# EAGLE board synth-a-phone-v1.1 (EAGLE 5.11)
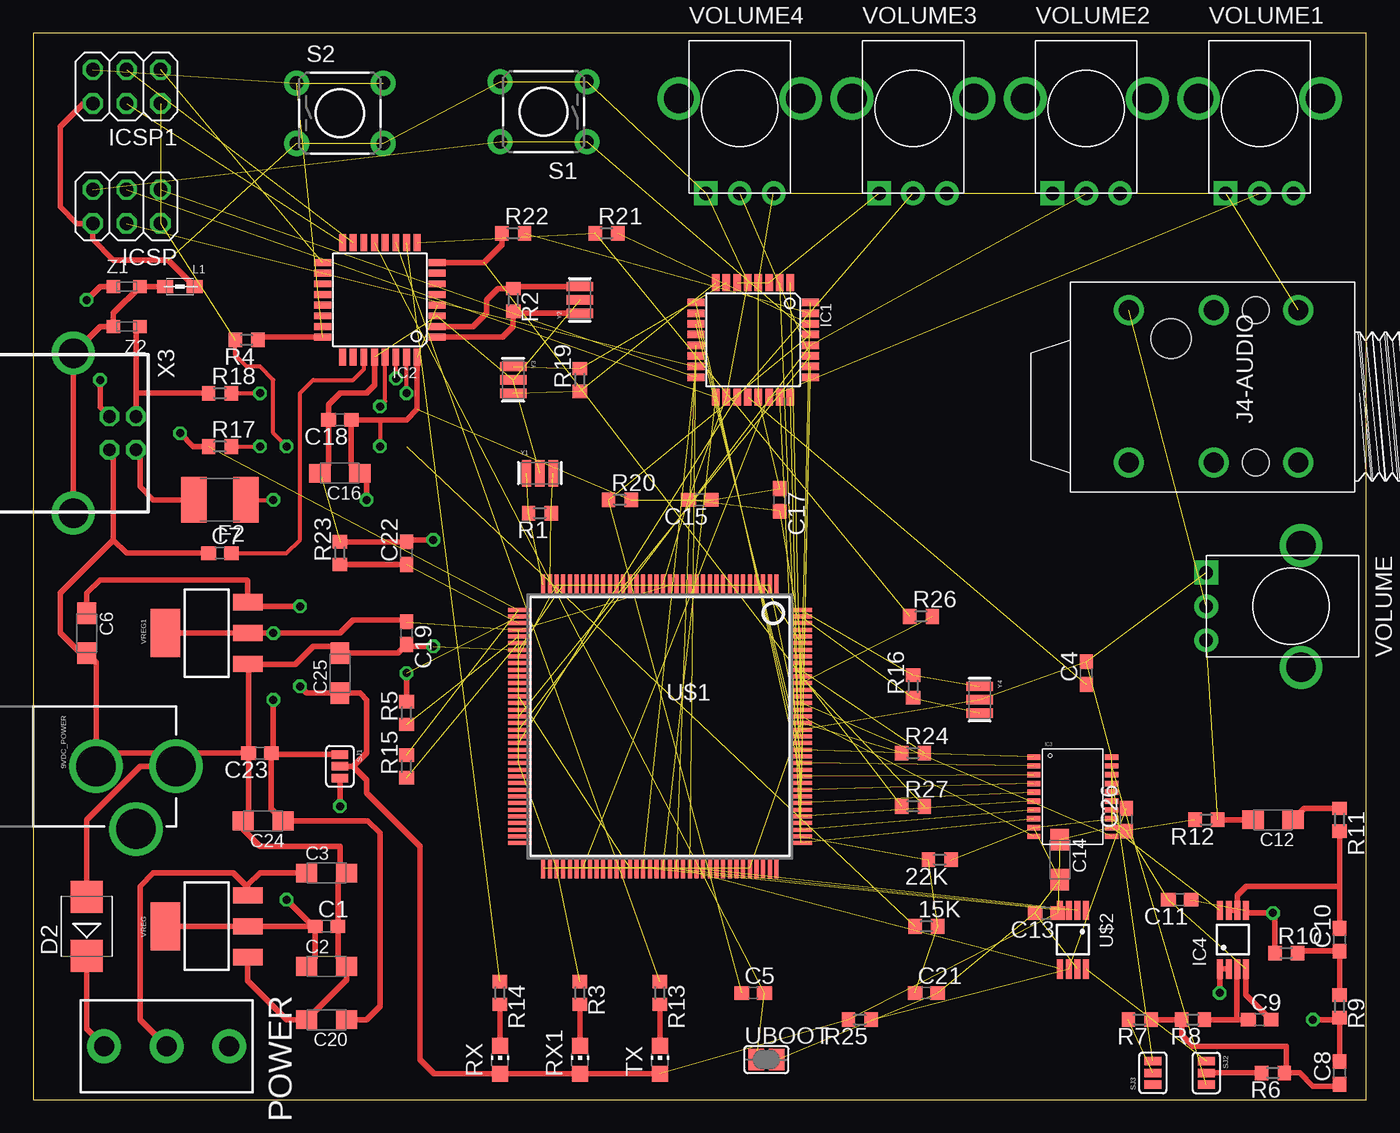
[diagram p0: board, top side]
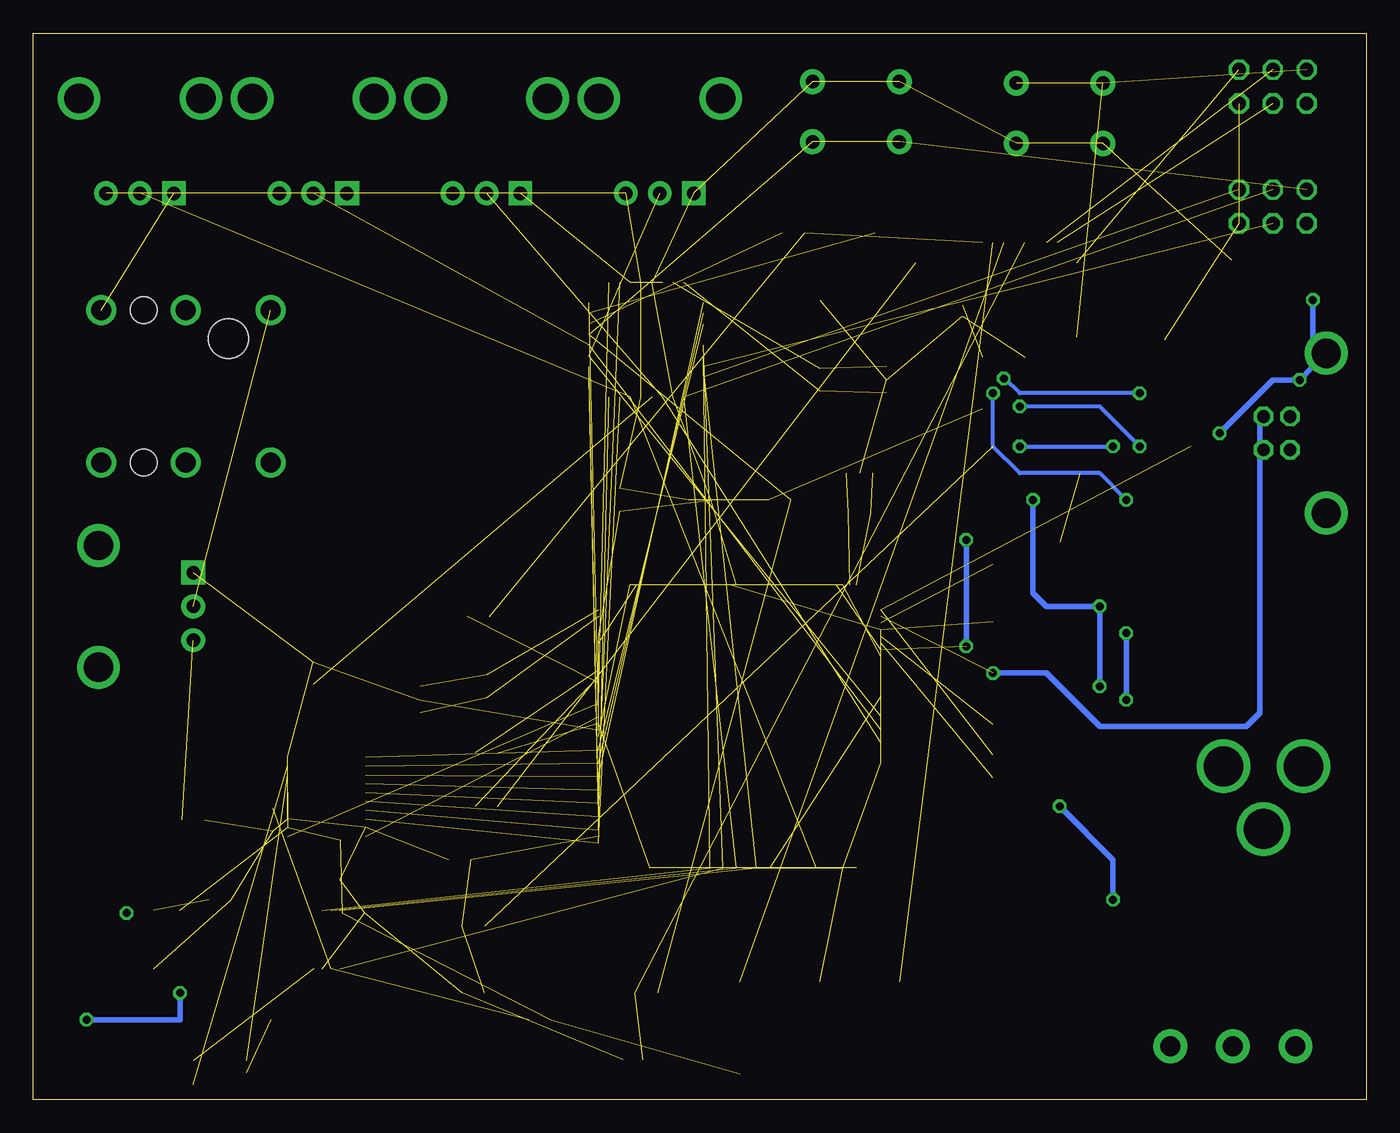
[diagram p1: board, bottom side, seen from below]

Size 100 x 80 mm. Coordinates in mm from the lower left corner, seen from the top.
Outline: 0,0 100,0 100,80 0,80 0,0
Copper layers (1*16): Top 0.035mm / dielectric 1.5mm / Bottom 0.035mm
Design rules "default": minimum track width 10mil, minimum drill 0.6mm, track to track 8mil, track to pad 8mil, pad to pad 8mil, via to via 8mil, smd to smd 8mil, copper to edge 40mil, drill to drill 8mil, minimum pad ring 10mil, minimum via ring 8mil, stop-mask expansion 4mil, vias tented up to drill 0mil, thermal gap 10mil

## Footprints (pad centres in the part's own frame; a part is rotated, then mirrored left to right if it is on the bottom)
POWER_JACK_PTH = drill 2.997 round: GND 0,7.7; GNDBREAK 4.7,10.7; PWR 0,13.7
R0603 = smd 1 x 1.1: 1 -0.85,0; 2 0.85,0
C0603 = smd 1.1 x 1: 1 -0.85,0; 2 0.85,0
SMC_A = smd 1.6 x 1.4: + -1.5,0; - 1.5,0
SMB = smd 2.4 x 2.4: A 2.2,0; C -2.2,0
L1812 = smd 1.9 x 3.4: 1 -1.95,0; 2 1.95,0
AVR_TQFP32-08 = smd 1.27 x 0.559: 1 -4.293,2.8; 2 -4.293,2; 3 -4.293,1.2; 4 -4.293,0.4; 5 -4.293,-0.4; 6 -4.293,-1.2; 7 -4.293,-2; 8 -4.293,-2.8; 17 4.293,-2.8; 18 4.293,-2; 19 4.293,-1.2; 20 4.293,-0.4; 21 4.293,0.4; 22 4.293,1.2; 23 4.293,2; 24 4.293,2.8 | smd 0.559 x 1.27: 9 -2.8,-4.293; 10 -2,-4.293; 11 -1.2,-4.293; 12 -0.4,-4.293; 13 0.4,-4.293; 14 1.2,-4.293; 15 2,-4.293; 16 2.8,-4.293; 25 2.8,4.293; 26 2,4.293; 27 1.2,4.293; 28 0.4,4.293; 29 -0.4,4.293; 30 -1.2,4.293; 31 -2,4.293; 32 -2.8,4.293
TQFP32-08 = smd 1.27 x 0.508: 1 -4.293,2.8; 2 -4.293,2; 3 -4.293,1.2; 4 -4.293,0.4; 5 -4.293,-0.4; 6 -4.293,-1.2; 7 -4.293,-2; 8 -4.293,-2.8; 17 4.293,-2.8; 18 4.293,-2; 19 4.293,-1.2; 20 4.293,-0.4; 21 4.293,0.4; 22 4.293,1.2; 23 4.293,2; 24 4.293,2.8 | smd 0.508 x 1.27: 9 -2.8,-4.293; 10 -2,-4.293; 11 -1.2,-4.293; 12 -0.4,-4.293; 13 0.4,-4.293; 14 1.2,-4.293; 15 2,-4.293; 16 2.8,-4.293; 25 2.8,4.293; 26 2,4.293; 27 1.2,4.293; 28 0.4,4.293; 29 -0.4,4.293; 30 -1.2,4.293; 31 -2,4.293; 32 -2.8,4.293
TSSOP20 = smd 1 x 0.4: 1 -2.937,2.693; 2 -2.937,2.032; 3 -2.937,1.372; 4 -2.937,0.712; 5 -2.937,0.051; 6 -2.937,-0.609; 7 -2.937,-1.27; 8 -2.943,-1.93; 9 -2.937,-2.59; 10 -2.937,-3.251; 11 2.905,-3.251; 12 2.905,-2.59; 13 2.911,-1.93; 14 2.905,-1.27; 15 2.905,-0.609; 16 2.905,0.051; 17 2.905,0.712; 18 2.905,1.372; 19 2.905,2.032; 20 2.905,2.693
MSOP8 = smd 1.45 x 0.45: 1 -2.2,0.975; 2 -2.2,0.325; 3 -2.2,-0.325; 4 -2.2,-0.975; 5 2.2,-0.975; 6 2.2,-0.325; 7 2.2,0.325; 8 2.2,0.975
2X03 = drill 1.016 octagon: 1 -2.54,-1.27; 2 -2.54,1.27; 3 0,-1.27; 4 0,1.27; 5 2.54,-1.27; 6 2.54,1.27
NRJ6HF-1 = drill 1.5 round: G -4.2,-5.91; R 7.23,0.44; RN -4.2,0.44; S 7.23,-5.91; T 7.23,6.79; TN -4.2,6.79 | hole 2: 7.23,-2.71; -4.2,-2.71 | hole 3: 5.1,3.64
0805 = smd 1.2 x 1: 1 -1.1,0; 2 1.1,0
SWITCH-SPDT = drill 1.5 pad 2.54 round: 1 0,4.699; 2 0,0; 3 0,-4.699
CHIP-LED0805 = smd 1.2 x 1.2: A 0,-1.05; C 0,1.05
TACTILE-PTH = drill 1.016 pad 1.88 round: 1 -3.251,2.261; 2 3.251,2.261; 3 -3.251,-2.261; 4 3.251,-2.261
SJ_3 = smd 0.635 x 1.27: 1 -0.889,0; 2 0,0; 3 0.889,0
SQFP-S-20X20-144 = smd 0.3 x 1.6: 1 -8.75,-10.6; 2 -8.25,-10.6; 3 -7.75,-10.6; 4 -7.25,-10.6; 5 -6.75,-10.6; 6 -6.25,-10.6; 7 -5.75,-10.6; 8 -5.25,-10.6; 9 -4.75,-10.6; 10 -4.25,-10.6; 11 -3.75,-10.6; 12 -3.25,-10.6; 13 -2.75,-10.6; 14 -2.25,-10.6; 15 -1.75,-10.6; 16 -1.25,-10.6; 17 -0.75,-10.6; 18 -0.25,-10.6; 19 0.25,-10.6; 20 0.75,-10.6; 21 1.25,-10.6; 22 1.75,-10.6; 23 2.25,-10.6; 24 2.75,-10.6; 25 3.25,-10.6; 26 3.75,-10.6; 27 4.25,-10.6; 28 4.75,-10.6; 29 5.25,-10.6; 30 5.75,-10.6; 31 6.25,-10.6; 32 6.75,-10.6; 33 7.25,-10.6; 34 7.75,-10.6; 35 8.25,-10.6; 36 8.75,-10.6; 73 8.75,10.6; 74 8.25,10.6; 75 7.75,10.6; 76 7.25,10.6; 77 6.75,10.6; 78 6.25,10.6; 79 5.75,10.6; 80 5.25,10.6; 81 4.75,10.6; 82 4.25,10.6; 83 3.75,10.6; 84 3.25,10.6; 85 2.75,10.6; 86 2.25,10.6; 87 1.75,10.6; 88 1.25,10.6; 89 0.75,10.6; 90 0.25,10.6; 91 -0.25,10.6; 92 -0.75,10.6; 93 -1.25,10.6; 94 -1.75,10.6; 95 -2.25,10.6; 96 -2.75,10.6; 97 -3.25,10.6; 98 -3.75,10.6; 99 -4.25,10.6; 100 -4.75,10.6; 101 -5.25,10.6; 102 -5.75,10.6; 103 -6.25,10.6; 104 -6.75,10.6; 105 -7.25,10.6; 106 -7.75,10.6; 107 -8.25,10.6; 108 -8.75,10.6 | smd 1.6 x 0.3: 37 10.6,-8.75; 38 10.6,-8.25; 39 10.6,-7.75; 40 10.6,-7.25; 41 10.6,-6.75; 42 10.6,-6.25; 43 10.6,-5.75; 44 10.6,-5.25; 45 10.6,-4.75; 46 10.6,-4.25; 47 10.6,-3.75; 48 10.6,-3.25; 49 10.6,-2.75; 50 10.6,-2.25; 51 10.6,-1.75; 52 10.6,-1.25; 53 10.6,-0.75; 54 10.6,-0.25; 55 10.6,0.25; 56 10.6,0.75; 57 10.6,1.25; 58 10.6,1.75; 59 10.6,2.25; 60 10.6,2.75; 61 10.6,3.25; 62 10.6,3.75; 63 10.6,4.25; 64 10.6,4.75; 65 10.6,5.25; 66 10.6,5.75; 67 10.6,6.25; 68 10.6,6.75; 69 10.6,7.25; 70 10.6,7.75; 71 10.6,8.25; 72 10.6,8.75; 109 -10.6,8.75; 110 -10.6,8.25; 111 -10.6,7.75; 112 -10.6,7.25; 113 -10.6,6.75; 114 -10.6,6.25; 115 -10.6,5.75; 116 -10.6,5.25; 117 -10.6,4.75; 118 -10.6,4.25; 119 -10.6,3.75; 120 -10.6,3.25; 121 -10.6,2.75; 122 -10.6,2.25; 123 -10.6,1.75; 124 -10.6,1.25; 125 -10.6,0.75; 126 -10.6,0.25; 127 -10.6,-0.25; 128 -10.6,-0.75; 129 -10.6,-1.25; 130 -10.6,-1.75; 131 -10.6,-2.25; 132 -10.6,-2.75; 133 -10.6,-3.25; 134 -10.6,-3.75; 135 -10.6,-4.25; 136 -10.6,-4.75; 137 -10.6,-5.25; 138 -10.6,-5.75; 139 -10.6,-6.25; 140 -10.6,-6.75; 141 -10.6,-7.25; 142 -10.6,-7.75; 143 -10.6,-8.25; 144 -10.6,-8.75
SJ = smd 1.168 x 1.6: 1 -0.762,0; 2 0.762,0
VACOLOCO_EVUF = drill 2.2 round: CASE1 -4.572,7.112; CASE2 4.572,7.112 | drill 1.016 pad 1.778 square: CCW -2.54,0 | drill 1.016 pad 1.778 round: CW 2.54,0; WIPER 0,0
SOT223 = smd 1.219 x 2.235: 1 -2.311,-3.099; 2 0,-3.099; 3 2.311,-3.099 | smd 3.6 x 2.2: 4 0,3.099
PN61729 = drill 0.95 octagon: 1 1.25,4.71; 2 -1.25,4.71; 3 -1.25,2.71; 4 1.25,2.71 | drill 2.2 round: P$1 -6,0; P$2 6,0
RESONATOR = smd 0.7 x 2: 1 -1,0; 2 0,0; 3 1,0
CT/CN0603 = smd 1 x 1: 1 -1,0; 2 1,0

## Placement (x,y rotation side)
9VDC_POWER  POWER_JACKPTH  [POWER_JACK_PTH]  -3,25 270 top
15K  15k  [R0603]  67,13 0 top
22K  22k  [R0603]  68,18 180 top
C1  0.1uF  [C0603]  22,13 0 top
C2  10uF  [SMC_A]  22,10 0 top
C3  0.33uF  [SMC_A]  22,17 0 top
C4  0.1uF  [C0603]  79,32 90 top
C5  0.1uF  [C0603]  54,8 0 top
C6  10uF  [SMC_A]  4,35 270 top
C7  0.1uF  [C0603]  14,41 0 top
C8  0.01uF  [C0603]  98,2 90 top
C9  470pF  [C0603]  92,6 0 top
C10  0.001uF  [C0603]  98,12 90 top
C11  470pF  [C0603]  86,15 180 top
C12  4.7uF  [SMC_A]  93,21 180 top
C13  0.1uF  [C0603]  76,14 180 top
C14  10uF  [SMC_A]  77,18 270 top
C15  0.1uF  [C0603]  50,45 180 top
C16  10uF  [SMC_A]  23,47 180 top
C17  0.1uF  [C0603]  56,45 270 top
C18  0.1uF  [C0603]  23,51 180 top
C19  0.1uF  [C0603]  28,35 270 top
C20  10uF  [SMC_A]  22,6 180 top
C21  0.1uF  [C0603]  67,8 0 top
C22  10pF  [C0603]  28,41 90 top
C23  0.1uF  [C0603]  17,26 180 top
C24  10uF  [SMC_A]  17.24,20.91 180 top
C25  0.33uF  [SMC_A]  23,32 90 top
C26  10pF  [C0603]  82,21 90 top
D2  M7  [SMB]  4,13 90 top
F2  500mA  [L1812]  14,45 180 top
IC1  AVR_ATMEGA328V-10A  [AVR_TQFP32-08]  54,57 270 top
IC2  ATMEGA32U2-TQFP  [TQFP32-08]  26,60 180 top
IC3  AD7302SMD  [TSSOP20]  78,23 0 top
IC4  MCP6002MSOP8  [MSOP8]  90,12 90 top
ICSP  ICSP  [2X03]  7,67 180 top
ICSP1  ICSP  [2X03]  7,76 180 top
J4-AUDIO  STEREOSWL  [NRJ6HF-1]  89,52 90 top
L1  BLM21  [0805]  11,61 180 top
POWER  SPST  [SWITCH-SPDT]  10,4 270 top
R1  1M  [R0603]  38,44 180 top
R2  1M  [R0603]  36,60 270 top
R3  1k  [R0603]  41,8 270 top
R4  10k  [R0603]  16,57 180 top
R5  1k  [R0603]  28,29 90 top
R6  1K  [R0603]  93,2 180 top
R7  274K  [R0603]  83,6 180 top
R8  10.7K  [R0603]  87,6 180 top
R9  4.64K  [R0603]  98,7 270 top
R10  23.7K  [R0603]  94,11 0 top
R11  100  [R0603]  98,21 270 top
R12  1M  [R0603]  88,21 180 top
R13  1k  [R0603]  47,8 270 top
R14  1k  [R0603]  35,8 270 top
R15  1k  [R0603]  28,25 90 top
R16  1M  [R0603]  66,31 90 top
R17  22  [R0603]  14,49 0 top
R18  22  [R0603]  14,53 0 top
R19  1M  [R0603]  41,54 90 top
R20  10k  [R0603]  44,45 0 top
R21  1k  [R0603]  43,65 0 top
R22  1k  [R0603]  36,65 0 top
R23  6K8  [R0603]  23,41 90 top
R24  1M  [R0603]  66,26 0 top
R25  1M  [R0603]  62,6 180 top
R26  1k  [R0603]  66.61,36.25 0 top
R27  1k  [R0603]  66,22 0 top
RX  YELLOW  [CHIP-LED0805]  35,3 0 top
RX1  YELLOW  [CHIP-LED0805]  41,3 0 top
S1  [TACTILE-PTH]  38.28,74.12 180 top
S2  [TACTILE-PTH]  23,74 0 top
SJ1  [SJ_3]  23,25 270 top
SJ2  [SJ_3]  88,2 270 top
SJ3  [SJ_3]  84,2 90 top
TX  YELLOW  [CHIP-LED0805]  47,3 0 top
U$1  ATSAM3U4ELQFP-144  [SQFP-S-20X20-144]  47,28 180 top
U$2  MCP4921MSOP8  [MSOP8]  78,12 270 top
UBOOT  [SJ]  55,3 0 top
VOLUME  Volume  [VACOLOCO_EVUF]  88,37 270 top
VOLUME1  Volume  [VACOLOCO_EVUF]  92,68 0 top
VOLUME2  Volume  [VACOLOCO_EVUF]  79,68 0 top
VOLUME3  Volume  [VACOLOCO_EVUF]  66,68 0 top
VOLUME4  Volume  [VACOLOCO_EVUF]  53,68 0 top
VREG  LM78L05  [SOT223]  13,13 90 top
VREG1  LM78L05  [SOT223]  13,35 90 top
X3  [PN61729]  3,50 270 top
Y1  16MHz  [RESONATOR]  38,47 0 top
Y2  16MHz  [RESONATOR]  41,60 90 top
Y3  16MHz  [RESONATOR]  36,54 270 top
Y4  16MHz  [RESONATOR]  71,30 270 top
Z1  PGB1010604  [CT/CN0603]  7,61 0 top
Z2  PGB1010604  [CT/CN0603]  7,58 180 top

## Library data of the parts
9VDC_POWER J4-AUDIO POWER VOLUME VOLUME1-VOLUME4 = meeblip
15K 22K C1-C26 F2 R1-R27 = rcl
D2 = diode
IC1 = avr
IC2 = adafruit
IC3 S1 S2 SJ1-SJ3 VREG VREG1 = SparkFun
IC4 U$1 U$2 = Sparky
ICSP ICSP1 = pinhead
L1 = wuerth-elektronik
RX RX1 TX = led
UBOOT = jumper
X3 Y1-Y4 = SmartPrj
Z1 Z2 = varistor

## Nets
+1V8: U$1.2 U$1.16 U$1.27 U$1.34 U$1.44 U$1.50 U$1.86 U$1.125
+3V3: C19.1 C20.+ C23.1 C24.+ R24.1 SJ1.1 U$1.3 U$1.17 U$1.40 U$1.51 U$1.73 U$1.85 U$1.104 U$1.127 U$1.139 VREG1.2 VREG1.4
+5V: C1.1 C2.+ SJ1.3 VREG.2 VREG.4
ANTI_ALIAS_OUT: C12.- R12.1 VOLUME.CW
AREF: C4.1 IC1.20
D+: R15.2 R17.1 U$1.37 X3.3 Z1.1
D-: R5.2 R18.1 U$1.38 X3.2 Z2.1
DAC1_AB: IC1.1 IC3.11 U$1.130
DAC1_DB0: IC1.23 IC3.8 U$1.109
DAC1_DB1: IC1.24 IC3.7 U$1.111
DAC1_DB2: IC1.25 IC3.6 U$1.113
DAC1_DB3: IC1.26 IC3.5 U$1.115
DAC1_DB4: IC1.2 IC3.4 U$1.117
DAC1_DB5: IC1.9 IC3.3 U$1.119
DAC1_DB6: IC1.10 IC3.2 U$1.121
DAC1_DB7: IC1.11 IC3.1 U$1.123
DAC1_VOUTA: IC3.19 SJ2.3
DAC1_VOUTB: IC3.18 SJ3.3
DAC1_WR: IC1.32 IC3.10 U$1.128
DAC2_CS: IC1.14 U$1.95 U$2.2
DAC2_LDAC: IC1.13 U$1.93 U$2.5
DAC2_VOUT: SJ2.1 U$2.8
DTR: C5.2 IC2.13 UBOOT.1
FWUP: R24.2 U$1.135
GND: 9VDC_POWER.GND 22K.1 C1.2 C2.- C3.- C4.2 C6.- C7.1 C9.2 C11.2 C13.2 C14.- C15.2 C16.- C17.2 C18.2 C19.2 C20.- C21.2 C22.2 C23.2 C24.- C25.- C26.1 IC1.3 IC1.5 IC1.18 IC2.3 IC2.28 IC3.9 IC3.13 IC3.17 IC3.20 IC4.4 ICSP1.6 ICSP.6 J4-AUDIO.S L1.1 R3.1 R12.2 R23.2 S1.3 S1.4 S2.3 S2.4 U$1.18 U$1.33 U$1.43 U$1.52 U$1.60 U$1.75 U$1.90 U$1.126 U$1.140 U$2.7 UBOOT.2 VOLUME1.CCW VOLUME2.CCW VOLUME3.CCW VOLUME4.CCW VOLUME.CCW VREG1.1 VREG.1 X3.4 Y1.2 Y2.2 Y3.2 Y4.2
M8RXD: IC2.9 R21.1 R26.1
M8TXD: IC2.8 R22.1 R27.1
MISO1: IC1.16 ICSP.1
MISO2: IC2.17 ICSP1.1
MOSI1: IC1.15 ICSP.4 U$1.88 U$2.4
MOSI2: IC2.16 ICSP1.4
N$1: R5.1 U$1.41
N$2: R15.1 U$1.42
N$3: R14.2 RX.C
N$4: R13.2 TX.C
N$5: C22.1 R23.1 U$1.39
N$6: R3.2 RX1.C
N$7: R26.2 U$1.133
N$8: IC1.30 R21.2
N$9: IC1.31 R22.2
N$10: R27.2 U$1.134
N$12: SJ3.1
N$15: C26.2 R25.1 U$2.6
N$21: C12.+ R11.1
N$25: 9VDC_POWER.PWR D2.A
N$27: C3.+ POWER.2 VREG.3
N$42: D2.C POWER.3
N$69: C8.1 R6.1 R7.1 R8.2
N$71: C9.1 IC4.3 R8.1
N$73: C10.1 R9.1 R10.2
N$74: C11.1 IC4.5 R10.1
NRST: U$1.11
NRSTB: U$1.141
POT1: IC1.27 U$1.53 VOLUME4.WIPER
POT2: IC1.28 U$1.55 VOLUME2.WIPER
POT3: IC1.19 U$1.57 VOLUME3.WIPER
POT4: IC1.22 U$1.79 VOLUME1.WIPER
RD+: IC2.29 R17.2
RD-: IC2.30 R18.2
RESET1: C5.1 IC1.29 ICSP.5 R20.1 S1.1 S1.2
RESET2: IC2.24 ICSP1.5 R4.1 S2.1 S2.2
RXLED: IC2.10 R14.1
SCK1: IC1.17 ICSP.3 U$1.91 U$2.3
SCK2: IC2.15 ICSP1.3
SHDN: U$1.136
STAGE1_IN1: R6.2 SJ2.2
STAGE1_IN2: R7.2 SJ3.2
STAGE1_OUT: C8.2 IC4.1 IC4.2 R9.2
STAGE2_OUT: C10.2 IC4.6 IC4.7 R11.2
TST: U$1.138
TXLED: IC2.11 R13.1
USBVCC: 15K.1 F2.1 IC2.31
USHIELD: L1.2 X3.P$1 X3.P$2 Z1.2 Z2.2
VBUS: F2.2 X3.1
VBUS_DETECT: 15K.2 22K.2 C21.1 U$1.110
VCC: C6.+ C13.1 C14.+ C15.1 C16.+ C17.1 C18.1 C25.+ IC1.4 IC1.6 IC1.21 IC2.4 IC2.32 IC3.12 IC3.14 IC3.15 IC3.16 IC4.8 ICSP1.2 ICSP.2 R4.2 R20.2 R25.2 RX1.A RX.A SJ1.2 TX.A VOLUME1.CW VOLUME2.CW VOLUME3.CW VOLUME4.CW VREG1.3
VDD: U$2.1
VOLUME_OUT: J4-AUDIO.T VOLUME.WIPER
VUCAP: C7.2 IC2.27
XTAL1: IC2.1 R2.2 Y2.1
XTAL2: IC2.2 R2.1 Y2.3
XTAL3: R1.2 U$1.36 Y1.1
XTAL4: R1.1 U$1.35 Y1.3
XTAL5: IC1.7 R19.2 Y3.1
XTAL6: IC1.8 R19.1 Y3.3
XTAL7: R16.2 U$1.144 Y4.1
XTAL8: R16.1 U$1.143 Y4.3

## Tracks (layer width: path | path; a pad name or v marks a point on that pad's centre or on a via)
+1V8  (7 unrouted)
+3V3  (via drill 0.6)  (10 unrouted)
  Top 0.406: C20.+ 25,6 26,7 26,20 25.09,20.91 C24.+ 17.85,21.8 C23.1 | C23.1 17.96,25.89 SJ1.1 | VREG1.4 VREG1.2 v18,35 23,35 24,36 27.85,36 C19.1 | v18,30 18,26.15 C23.1
  Bottom 0.406: v18,30 v18,35
+5V  (via drill 0.6)
  Top 0.406: VREG.4 VREG.2 C1.1 | C2.+ 21.15,10.65 C1.1 | C1.1 21,13 v19,15 | v23,22 SJ1.3
  Bottom 0.406: v19,15 19,18 v23,22
ANTI_ALIAS_OUT  (1 unrouted)
  Top 0.406: R12.1 C12.-
AREF  (1 unrouted)
D+  (via drill 0.6)  (2 unrouted)
  Top 0.406: X3.3 5,51.96 v5,54 | v4,60 5,61 Z1.1 | R17.1 12,49 v11,50
  Bottom 0.406: v4,60 4,55 v5,54 7,54 v11,50
D-  (via drill 0.6)  (1 unrouted)
  Top 0.406: Z2.1 7.71,57.71 7.71,53 | X3.2 7.71,53 | 7.71,53 R18.1 | v28,32 R5.2
  Bottom 0.406: v28,32 24,32 20,28 9,28 8,29 8,50.96 X3.2
DAC1_AB  (2 unrouted)
DAC1_DB0  (2 unrouted)
DAC1_DB1  (2 unrouted)
DAC1_DB2  (2 unrouted)
DAC1_DB3  (2 unrouted)
DAC1_DB4  (2 unrouted)
DAC1_DB5  (2 unrouted)
DAC1_DB6  (2 unrouted)
DAC1_DB7  (2 unrouted)
DAC1_VOUTA  (1 unrouted)
DAC1_VOUTB  (1 unrouted)
DAC1_WR  (2 unrouted)
DAC2_CS  (2 unrouted)
DAC2_LDAC  (2 unrouted)
DAC2_VOUT  (1 unrouted)
DTR  (2 unrouted)
FWUP  (1 unrouted)
GND  (via drill 0.6)  (47 unrouted)
  Top 0.406: C9.2 90.97,7.88 IC4.4 | VREG.1 16.1,8.9 19,6 C20.- 23.5,9 C2.- 22.85,10.65 C1.2 22.85,16.35 23,16.5 | 23,16.5 C3.- | 23,16.5 23,19 17,19 15.74,20.26 C24.- 16.15,21.32 C23.2 | C23.2 5.7,26 9VDC_POWER.GND 4.7,32.8 C6.- 3.5,33.5 2,35 2,38 6,42 | C23.2 16.15,32.64 | 16.15,32.64 VREG1.1 | 16.15,32.64 19.64,32.64 21,34 22.5,34 C25.- 27.35,33.5 C19.2 28.15,34 v30,34 | L1.1 10.1,63 6,63 4.46,64.54 ICSP.6 3.27,65.73 2,67 2,73 3.73,74.73 ICSP1.6 | C7.1 7,41 6,42 | 6,42 6,48.46 X3.4 | IC2.28 25.6,53.6 25,53 23,53 22.15,52.15 C18.2 22.15,47.65 C16.- | C22.2 R23.2 | C22.2 28,42 | C22.2 28.15,42 v30,42
  Bottom 0.406: v30,34 v30,42
M8RXD  (2 unrouted)
M8TXD  (1 unrouted)
  Top 0.406: R22.1 35.15,64.15 33.8,62.8 IC2.8
MISO1  (1 unrouted)
MISO2  (1 unrouted)
MOSI1  (3 unrouted)
MOSI2  (1 unrouted)
N$1  (1 unrouted)
N$2  (1 unrouted)
N$3
  Top 0.406: RX.C R14.2
N$4
  Top 0.406: TX.C R13.2
N$5  (1 unrouted)
  Top 0.406: R23.1 C22.1
N$6
  Top 0.406: RX1.C R3.2
N$7  (1 unrouted)
N$8  (1 unrouted)
N$9  (1 unrouted)
N$10  (1 unrouted)
N$15  (2 unrouted)
N$21
  Top 0.406: C12.+ 95.35,21.85 R11.1
N$25
  Top 0.406: D2.A 4,21 8,25 9VDC_POWER.PWR
N$27
  Top 0.406: POWER.2 8,6 8,16 9,17 15,17 16.1,15.9 VREG.3 16.1,16.1 17,17 C3.+
N$42
  Top 0.406: POWER.3 4,5.3 D2.C
N$69
  Top 0.406: C8.1 97.85,1 96,1 95,2 R6.1 94,2.15 94,4 87,4 86.15,4.85 R8.2 R7.1
N$71
  Top 0.406: IC4.3 90.3,9.78 90.3,6 | 90.3,6 C9.1 | R8.1 90.3,6
N$73
  Top 0.406: R9.1 C10.1 95,11.15 R10.2
N$74  (via drill 0.6)  (1 unrouted)
  Top 0.406: IC4.5 91.17,14 v93,14 93.15,13.85 R10.1
POT1  (2 unrouted)
POT2  (2 unrouted)
POT3  (2 unrouted)
POT4  (2 unrouted)
RD+  (via drill 0.6)
  Top 0.305: IC2.29 26.4,52.4 v26,52 | R17.2 v17,49
  Bottom 0.305: v26,52 20,52 v17,49
RD-  (via drill 0.6)
  Top 0.305: v27.2,54.1 IC2.30 | R18.2 v17,53
  Bottom 0.305: v27.2,54.1 27.1,54.1 26,53 v17,53
RESET1  (5 unrouted)
RESET2  (3 unrouted)
  Top 0.406: R4.1 17.05,57.2 IC2.24
RXLED  (1 unrouted)
SCK1  (3 unrouted)
SCK2  (1 unrouted)
STAGE1_IN1
  Top 0.406: SJ2.2 R6.2
STAGE1_IN2  (1 unrouted)
STAGE1_OUT  (via drill 0.6)
  Top 0.406: C8.2 R9.2 97.85,6 v96,6 | IC4.2 IC4.1 89,9.78 v89,8
  Bottom 0.406: v96,6 89,6 v89,8
STAGE2_OUT
  Top 0.406: 98,16 C10.2 | 98,16 R11.2 | IC4.7 IC4.6 90.33,15.32 91,16 98,16
TXLED  (1 unrouted)
USBVCC  (via drill 0.6)  (1 unrouted)
  Top 0.305: v28,53 IC2.31 | F2.1 v18,45
  Bottom 0.305: v28,53 28,49 26,47 20,47 v18,45
USHIELD
  Top 0.406: X3.P$2 X3.P$1 5,58 Z2.2 6,59 Z1.2 L1.2
VBUS
  Top 0.406: X3.1 8,48.46 8,46 9,45 F2.2
VBUS_DETECT  (3 unrouted)
VCC  (via drill 0.6)  (21 unrouted)
  Top 0.305: R4.2 15.15,55.85 16,55 17,55 18,54 18,50 v19,49 | 26,51 v26,49
  Top 0.406: TX.A RX1.A RX.A 30.05,1.95 29,3 29,19 25,23 25,24 24,25 | 24,25 SJ1.2 | 24,25 25,26 25,30 24.5,30.5 C25.+ 20.5,30.5 v20,31 | v20,37 16.41,37 VREG1.3 16.1,38.9 16,39 5,39 4,38 C6.+ | IC2.32 28.8,51.8 28,51 26,51 C18.1 23.85,47.65 C16.+ 25,46.5 v25,45
  Bottom 0.305: v26,49 v19,49
  Bottom 0.406: v20,31 v20,37 24,37 25,38 v25,45
VOLUME_OUT  (1 unrouted)
VUCAP
  Top 0.305: IC2.27 24.8,54.8 24,54 21,54 20,53 20,42 19,41 C7.2
XTAL1
  Top 0.406: IC2.1 35.2,57.2 36,58 R2.2 36.15,59 Y2.1
XTAL2
  Top 0.406: Y2.3 36.15,61 R2.1 34.85,60.85 34,60 34,59 33,58 IC2.2
XTAL3  (2 unrouted)
XTAL4  (2 unrouted)
XTAL5  (2 unrouted)
XTAL6  (2 unrouted)
XTAL7  (2 unrouted)
XTAL8  (2 unrouted)